# EAGLE board MODULO CNY70 (EAGLE 8.6.0)
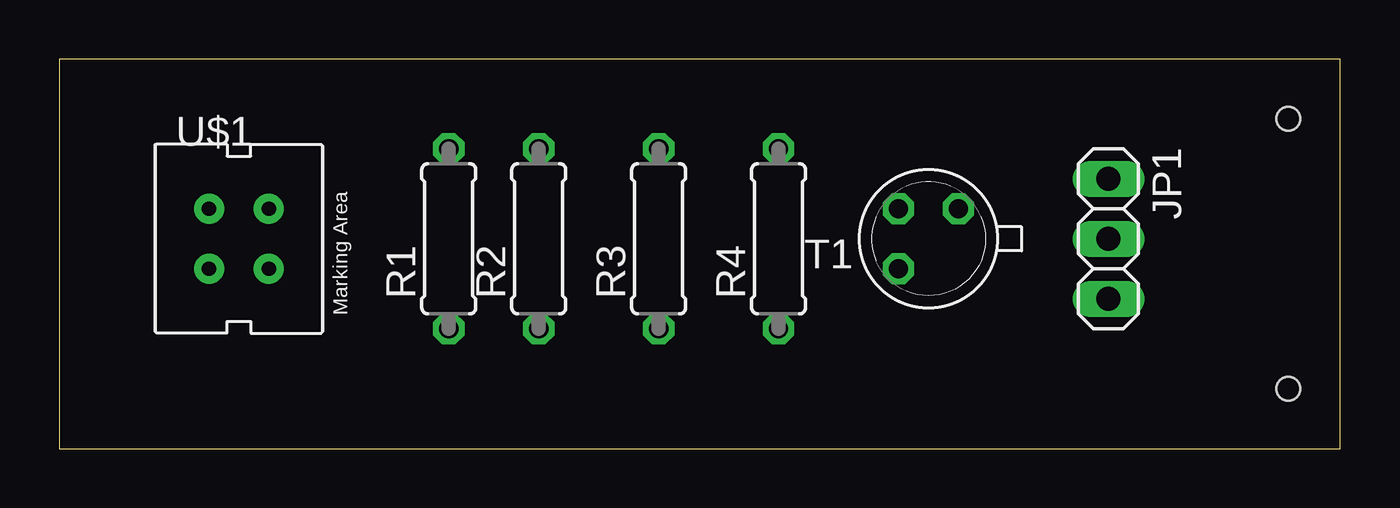
[diagram p0: board, top side]
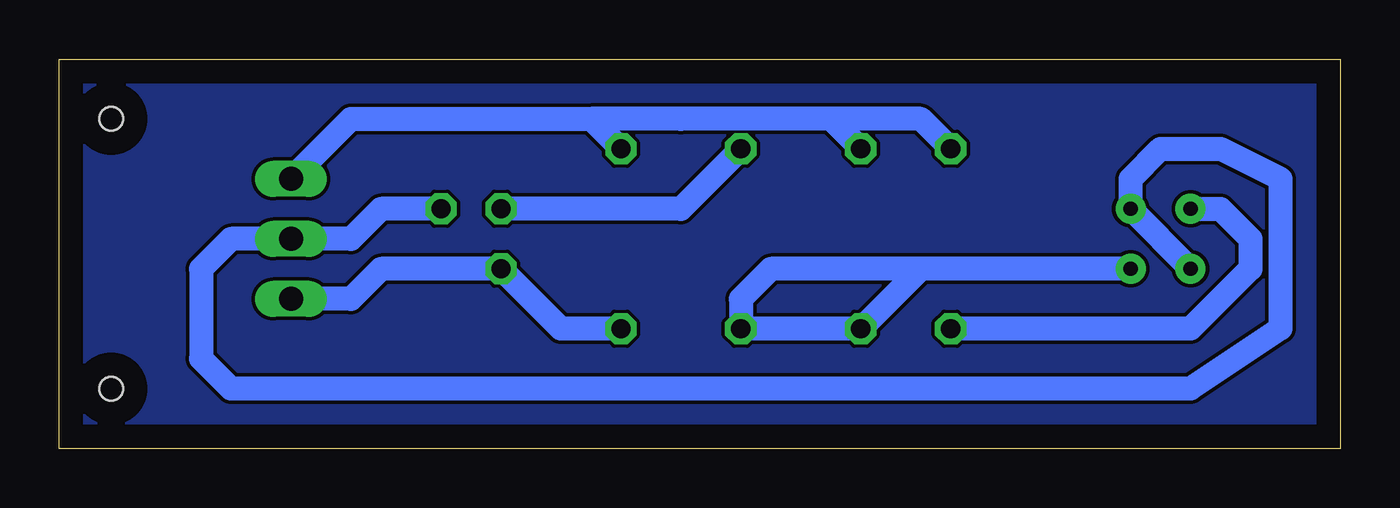
[diagram p1: board, bottom side, seen from below]

Size 54.28 x 16.5 mm. Coordinates in mm from the lower left corner, seen from the top.
Outline: 0,0 54.28,0 54.28,16.5 0,16.5 0,0
Copper layers (1*16): Top 0.035mm / dielectric 1.5mm / Bottom 0.035mm
Design rules "default": minimum track width 6mil, minimum drill 0.35mm, track to track 6mil, track to pad 6mil, pad to pad 6mil, via to via 6mil, smd to smd 6mil, copper to edge 40mil, drill to drill 6mil, minimum pad ring 10mil, minimum via ring 8mil, stop-mask expansion 4mil, vias tented up to drill 0mil, thermal gap 10mil
Holes 1 mm at 52.07,2.54 52.07,13.97

## Footprints (pad centres in the part's own frame; a part is rotated, then mirrored left to right if it is on the bottom)
1X03 = drill 1.016 long: 1 -2.54,0; 2 0,0; 3 2.54,0
0207/7 = drill 0.813 octagon: 1 -3.81,0; 2 3.81,0
TO18 = drill 0.813 octagon: 1 -1.27,-1.27; 2 1.27,-1.27; 3 1.27,1.27
4 = drill 0.61 pad 1.27: A -1.27,1.27; C 1.27,-1.27; E 1.27,1.27; K -1.27,-1.27

## Placement (x,y rotation side)
JP1  [1X03]  44.45,8.89 270 top
R1  330  [0207/7]  16.51,8.89 90 top
R2  100K  [0207/7]  20.32,8.89 90 top
R3  220  [0207/7]  25.4,8.89 90 top
R4  1K  [0207/7]  30.48,8.89 90 top
T1  2N2222  [TO18]  36.83,8.89 180 top
U$1  CNY70  [4]  7.62,8.89 0 top

## Library data of the parts
JP1 = pinhead
R1-R4 = rcl; SPICEPREFIX: R
T1 = transistor
U$1 = cny70

## Nets
N$1: R1.1 U$1.A
N$2: R2.1 R3.1 U$1.C
N$3: JP1.1 R1.2 R2.2 R4.2
N$4: JP1.2 T1.1 U$1.E U$1.K
N$5: R3.2 T1.2
N$6: JP1.3 R4.1 T1.3

## Tracks (layer width: path | path; a pad name or v marks a point on that pad's centre or on a via)
GND
  pour Bottom (isolate 0.01): 0,0 0,16.51 54.61,16.51 54.61,0
N$1
  Bottom 1.016: U$1.A 5.08,10.16 3.81,8.89 3.81,7.62 6.35,5.08 R1.1
N$2
  Bottom 1.016: U$1.C 17.78,7.62 | 17.78,7.62 R2.1 R3.1 25.4,6.35 24.13,7.62 17.78,7.62
N$3
  Bottom 1.016: JP1.1 41.91,13.97 31.75,13.97 | 31.75,13.97 R4.2 | R1.2 17.78,13.97 21.59,13.97 | 21.59,13.97 27.94,13.97 31.75,13.97 | R2.2 21.59,13.97
N$4
  Bottom 1.016: U$1.K U$1.E 8.89,11.43 7.62,12.7 5.08,12.7 2.54,11.43 2.54,5.08 6.35,2.54 46.99,2.54 48.26,3.81 48.26,7.62 46.99,8.89 JP1.2 41.91,8.89 40.64,10.16 T1.1
N$5
  Bottom 1.016: R3.2 27.94,10.16 T1.2
N$6
  Bottom 1.016: R4.1 33.02,5.08 T1.3 40.64,7.62 41.91,6.35 JP1.3